# Altium PCB Sensor_Board.PcbDoc
Units mm, origin at the board's own origin, x right, y up, seen from the top; angles counter-clockwise.
Board outline 10 x 14 mm, 4 copper layers (Top Layer, Layer 1, Layer 2, Bottom Layer), stack 0.602 mm thick; 11 components, 8 nets, 50 pads, 19 vias.
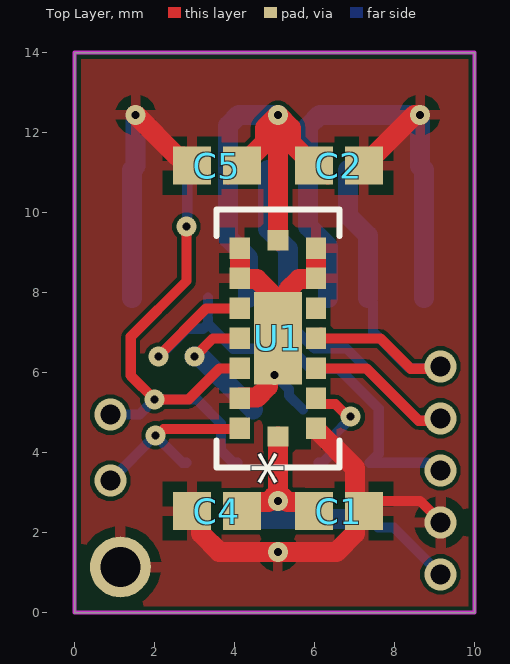
[diagram p0: Top Layer view]
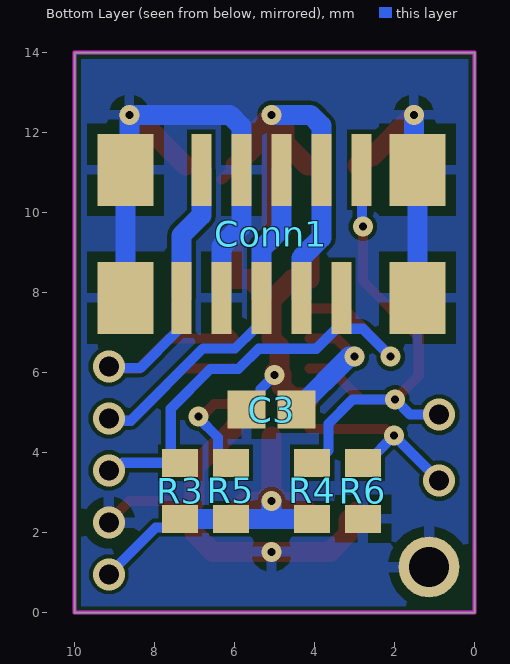
[diagram p1: Bottom Layer view, seen from below]
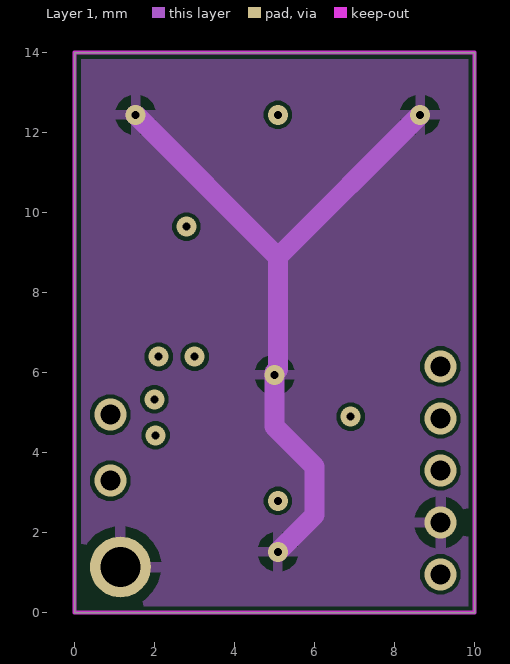
[diagram p2: Layer 1]
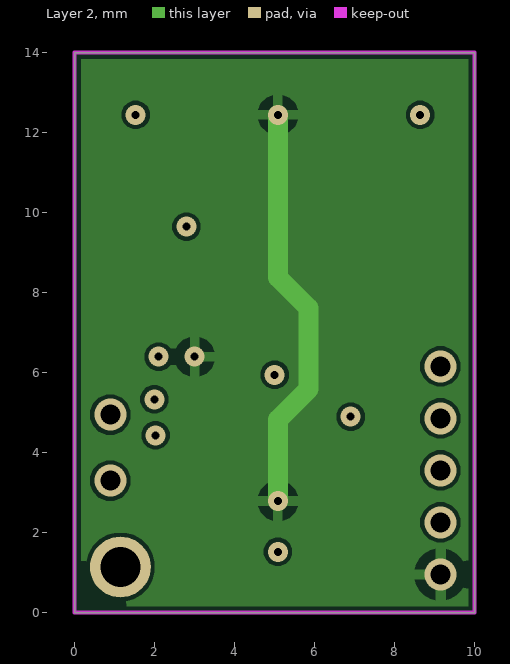
[diagram p3: Layer 2]
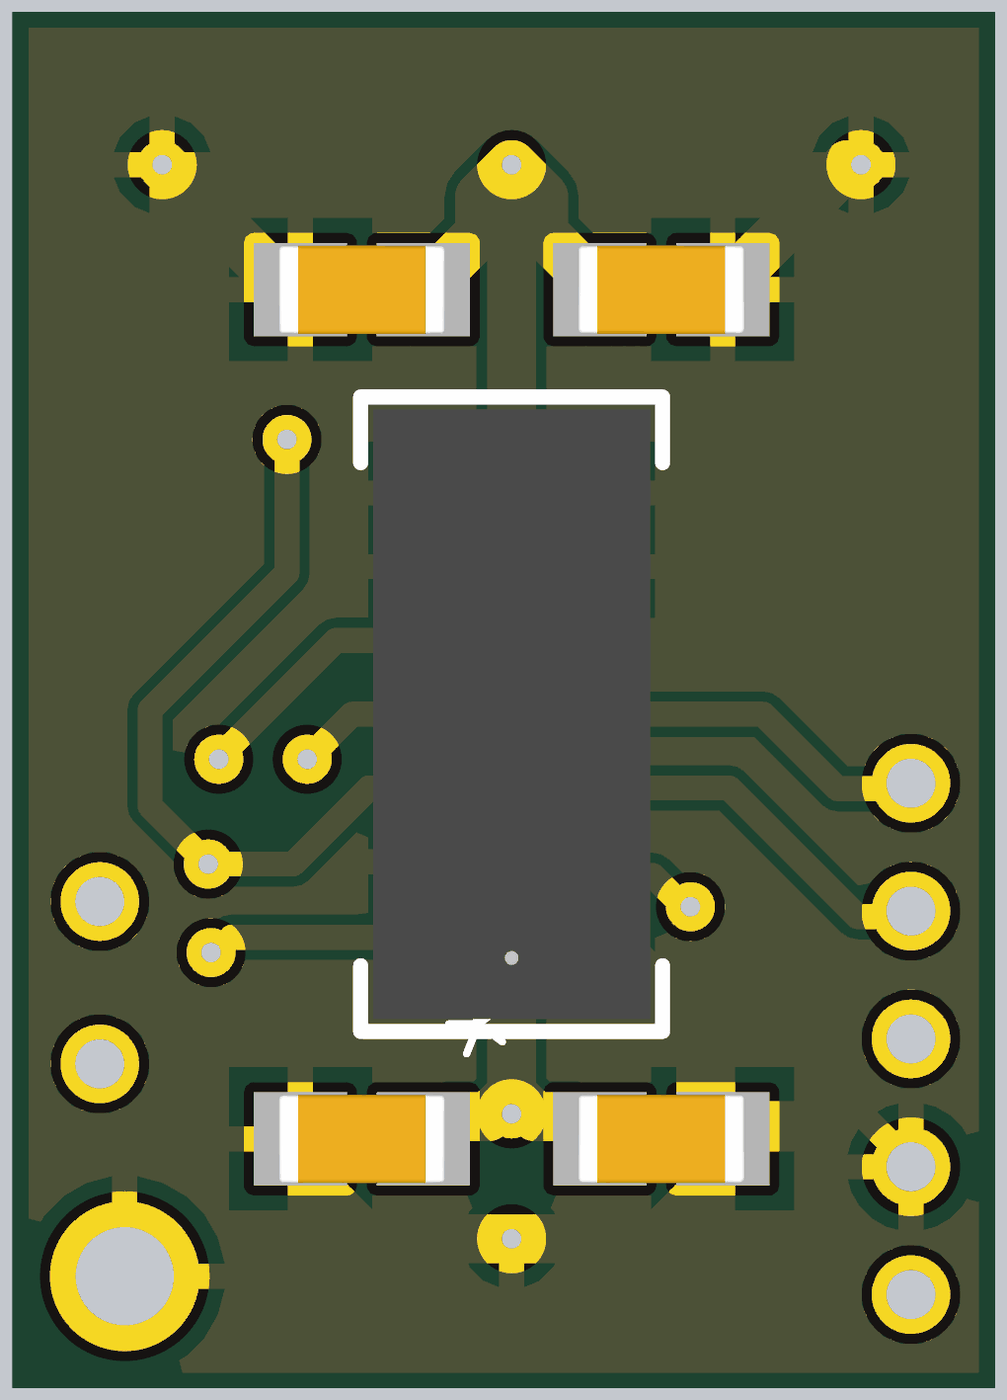
[diagram p4: 3D render of the assembled board from above, using the file's embedded part models]
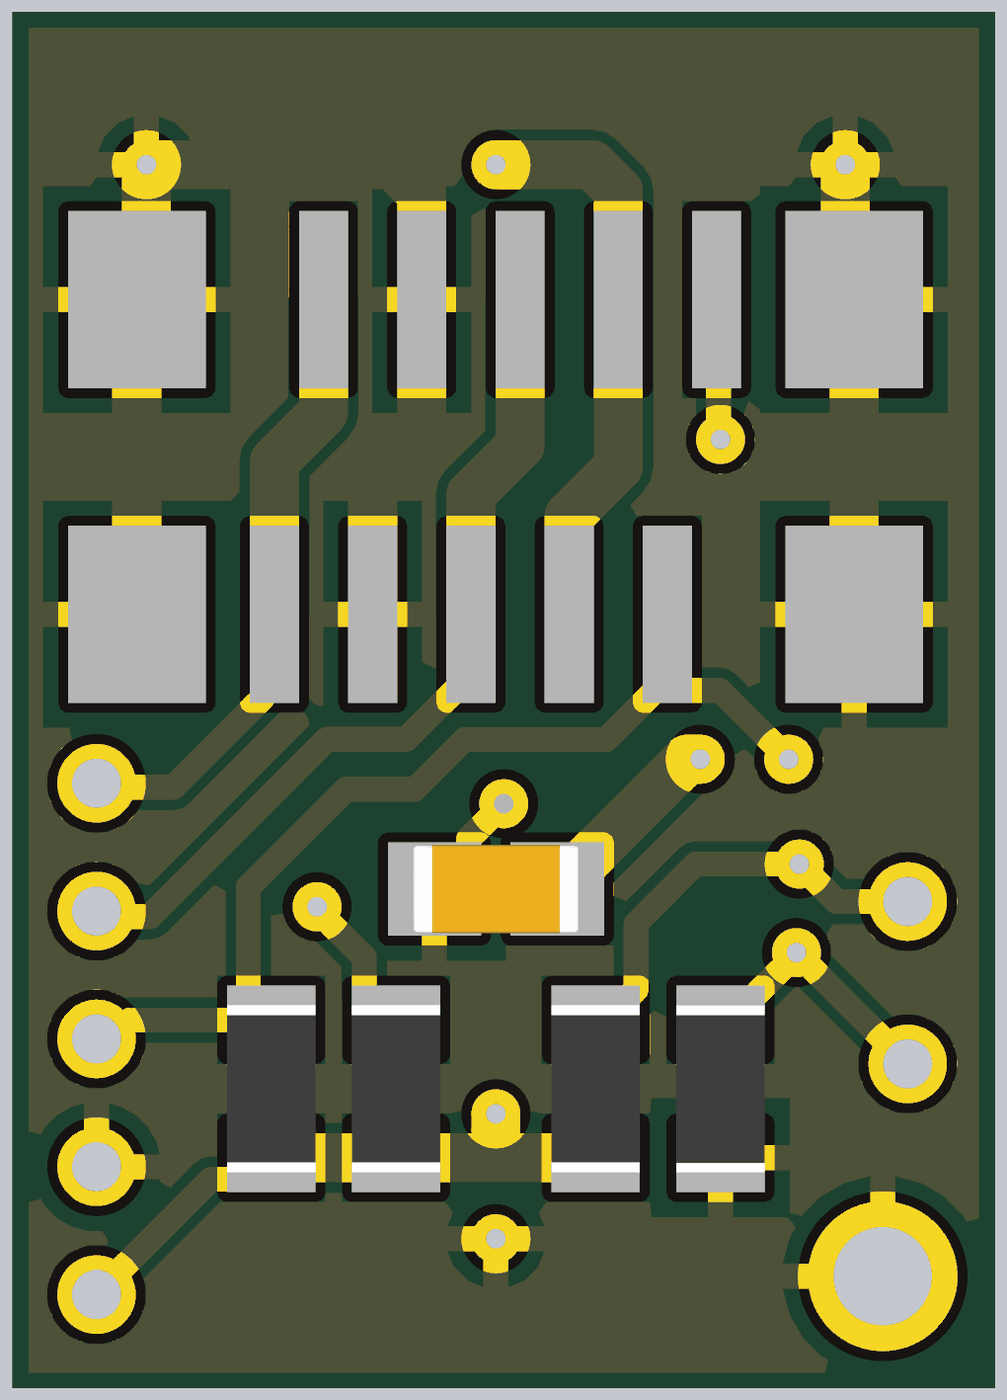
[diagram p5: 3D render of the assembled board from below, using the file's embedded part models]

## Layer stack, top to bottom
Top Solder: solder mask 0.0102, Solder Resist, Dk 3.5
Top Layer: signal copper 0.035
Dielectric 2: prepreg 0.0711, PP-006, Dk 4.1
Layer 1: signal copper 0.035
Dielectric 1: dielectric 0.32, FR-4, Dk 4.8
Layer 2: signal copper 0.035
Dielectric 3: prepreg 0.0711, PP-006, Dk 4.1
Bottom Layer: signal copper 0.035
Bottom Solder: solder mask 0.0102, Solder Resist, Dk 3.5

## Board outline
0,0 10,0 10,14 0,14

## Design rules (kind name [scope] priority, off if disabled: settings)
Clearance [All] p1: gap=0.1 ignorepadtopadclearanceinfootprint=TRUE except(0: Arc-Hole Track-Hole SMDPad-Hole THPad-Hole Via-Hole Fill-Hole Poly-Hole Region-Hole Text-Hole; 0.127: SMDPad-SMDPad SMDPad-Via SMDPad-Text THPad-Via THPad-Text Via-Text Fill-Text Poly-Text Region-Text Text-Text; 0.2: Arc-SMDPad Track-SMDPad; 0.254: Arc-THPad Arc-Via Arc-Text Track-THPad Track-Via Track-Text SMDPad-THPad THPad-THPad Via-Via)
HoleSize [All] p1: absolutevalues=TRUE maxlimit=5 minlimit=0.025 maxpercent=80.000 minpercent=20.000
PolygonConnect [All] p1: connectstyle=Relief reliefconductorwidth=0.254 reliefentries=4 polygonreliefangle="90 Angle" airgapwidth=0.254
RoutingVias [All] p1: holewidth=0.2 width=0.4 viastyle="Through Hole" minholewidth=0.2 minwidth=0.4 maxholewidth=1 maxwidth=1
SolderMaskExpansion [All] p1: expansion=0.102 istentingtop=FALSE
Width [All] p1: maxlimit=0.5 minlimit=0.127 preferedwidth=0.254
29 further rules are at their usual default settings.

## Components (designator, comment, footprint, x,y, rotation, side; value= is the part's Value field where it differs from the comment)
C1 "Capacitor 100 nF +/-10% 50 V 0603" CAPC1608X90X40NL10T20 6.604,2.54 r0 top value=100nF
C2 "Capacitor 100 nF +/-10% 50 V 0603" CAPC1608X90X40NL10T20 6.604,11.176 r0 top value=100nF
C3 "Capacitor 100 nF +/-10% 50 V 0603" CAPC1608X90X40NL10T20 5.08,5.08 r0 bottom value=100nF
C4 "Capacitor 100 nF +/-10% 50 V 0603" CAPC1608X90X40NL10T20 3.556,2.54 r180 top value=4.7uF
C5 "Capacitor 100 nF +/-10% 50 V 0603" CAPC1608X90X40NL10T20 3.556,11.176 r180 top value=4.7uF
Conn1 "ZIF_Connector_10_05mm" ZIF_CONNECTOR_10_05MM 9.534,6.874 r180 bottom
R3 "Resistor 0R +/- 5% 0603 100 mW" RESC1608X55X25NL10T15 7.366,3.048 r90 bottom value=47k
R4 "Resistor 0R +/- 5% 0603 100 mW" RESC1608X55X25NL10T15 4.064,3.048 r90 bottom value=47k
R5 "Resistor 0R +/- 5% 0603 100 mW" RESC1608X55X25NL10T15 6.096,3.048 r90 bottom value=47k
R6 "Resistor 0R +/- 5% 0603 100 mW" RESC1608X55X25NL10T15 2.794,3.048 r270 bottom value=47k
U1 "VL53L5CX" VL53L5CX 5.08,6.858 r90 top

## Footprints (in the part's own frame and the unit in brackets; to place one, negate y for a bottom-side part, rotate by r counter-clockwise, add the part's x,y. Pads: shape width x height; smd on the part's side, far side on the other; paste and mask are expansions set on the pad)
CAPC1608X90X40NL10T20 [mm] "Chip Capacitor, 2-Leads, Body 1.70x0.90mm, IPC Medium Density"
  rect 0.95x0.95 smd: 1(-0.625,0) 2(0.625,0)
  body extent -0.85,-0.45 0.85,0.45, height 0.9
RESC1608X55X25NL10T15 [mm] "Chip Resistor, 2-Leads, Body 1.70x0.90mm, IPC Medium Density"
  rect 0.7x0.9 smd: 1(-0.7,0) 2(0.7,0)
  body extent -0.85,-0.45 0.85,0.45, height 0.55
VL53L5CX [mil]
  rect 21x20 smd paste+0 mask+0: A1(-88.58,37.5) A2(-59.06,37.5) A3(-29.53,37.5) A4(0,37.5) A5(29.53,37.5) A6(59.06,37.5) A7(88.58,37.5) C1(-88.58,-37.5) C2(-59.06,-37.5) C3(-29.53,-37.5) C4(0,-37.5) C5(29.53,-37.5) C6(59.06,-37.5) C7(88.58,-37.5)
  rect 20x21 smd paste+0 mask+0: B1(-96.5,0) B7(96.5,0)
  rect 91x47 smd paste+0 mask+0: B4(0,0)
  silkscreen extent -127,-61 127,61, body extent -122,-56 122,56, height 65
ZIF_CONNECTOR_10_05MM [mm]
  rect 0.5x1.8 smd: 1(6.7,4.2) 2(6.2,1) 3(5.7,4.2) 4(5.2,1) 5(4.7,4.2) 6(4.2,1) 7(3.7,4.2) 8(3.2,1) 9(2.7,4.2) 10(2.2,1)
  rect 1.4x1.8 smd: GND(0.8,1) GND(0.8,4.2) GND(8.1,1) GND(8.1,4.2)

## Part data
C1 C2 C3 C4 C5: library part CMP-001-00017-5, "Chip Capacitor, 100 nF, +/- 10%, 50 V, 0603 (1608 Metric)", Capacitor Type=Ceramic, Case/Package=0603, Max Operating Temperature=125°C, Min Operating Temperature=-55°C, Tolerance=10%, Voltage Rating=50V, Mounting Technology=SM, Pins=2, RoHS Compliant=True
R3 R4 R5 R6: library part CMP-009-00006-4, "Chip Resistor, 0 Ohm, 0.1 W, -55 to 155 degC, 0603 (1608 Metric)", Case/Package=0603, Max Operating Temperature=155°C, Min Operating Temperature=-55°C, Power=100mW, Tolerance=5%, Voltage Rating=50V, Mounting Technology=SM, Pins=2, RoHS Compliant=True
U1: "No Description Available", Manufacturer_Part_Number=VL53L5CXV0GC/1, Mfr_Name=STMicroelectronics, Copyright="Copyright (C) 2022 Ultra Librarian. All rights reserved.", RefDes=RefDes, Type=DEV

## Free pads (board coordinates)
  round 1.524 hole 1: 5(1.143,1.143)

## Via types
v1: diameter 0.5, hole 0.2, Top Layer to Bottom Layer, 12 vias
v2: diameter 0.8, hole 0.5, Top Layer to Bottom Layer, 7 vias

## Nets (pads, with @x,y where several pads share a name; then routed paths per layer and width w, separated by ;. In a path a pad name is that pad's centre, name@x,y a point inside that pad or via, vN(x,y) a via of type N, cw(c..) or ccw(c..) an arc to the next point about the centre after c; other vN are vias at no path point)
3.3V: C1.1 C2.1 C3.1 C4.1 C5.1 Conn1.3 Conn1.4 R3.1 R4.1 R5.1 U1.A4 U1.B1 U1.B7 | length 36.8
  Top Layer w0.254: v1(3,6.4) 3.458,6.858 U1.A4 ; C5.1@3.833,10.828 C5.1 ; C2.1 C2.1@6.327,10.828
  Top Layer w0.5: C4.1 4.406,2.765 4.838,2.765 4.974,2.9 v1(5.08,2.794) ; C5.1 4.754,11.749 4.754,12.12 v1(5.08,12.446) ; U1.B1 v1(5.08,2.794) ; U1.B7 v1(5.08,12.446) ; C1.1 5.754,2.765 5.322,2.765 5.186,2.9 v1(5.08,2.794) ; C2.1 5.406,11.749 5.406,12.12 v1(5.08,12.446)
  Layer 2 w0.5: v1(5.08,2.794) 5.08,4.826 5.842,5.588 5.842,7.62 5.08,8.382 v1(5.08,12.446)
  Bottom Layer w0.254: R3.1 7.585,2.129 7.978,2.129 9.144,0.963 v2(9.144,0.956)
  Bottom Layer w0.5: v1(3,6.4) 3.135,6.4 C3.1 ; R4.1 5.08,2.348 ; Conn1.4 4.334,8.874 3.834,9.374 Conn1.3 3.834,12.177 4.103,12.446 v1(5.08,12.446) ; v1(5.08,2.794) 5.08,2.348 ; R3.1 R5.1 5.08,2.348
GND: C1.2 C2.2 C3.2 C4.2 C5.2 Conn1.7 Conn1.8 Conn1.GND pad.5 R6.2 U1.A2 U1.A6 U1.A7 U1.B4 U1.C1 U1.C6 U1.C7 | length 57.7
  Top Layer w0.254: C1.2 7.483,2.794 8.636,2.794 9.144,2.286 v2(9.144,2.256)
  Top Layer w0.5: v1(1.524,12.446) 2.569,11.401 2.706,11.401 C5.2 ; C4.2 3.156,2.315 3.156,1.979 3.611,1.524 v1(5.08,1.524) 6.549,1.524 7.004,1.979 7.004,2.315 C1.2 7.004,2.765 7.004,3.624 6.032,4.595 U1.C1 ; U1.A2 4.127,5.371 4.132,5.375 4.551,5.375 4.831,5.655 4.831,5.953 4.879,6 4.879,6.657 U1.B4 U1.B4@5.08,7.765 ; U1.A7 4.127,8.345 4.132,8.341 4.551,8.341 5.08,7.813 U1.B4@5.08,7.765 ; U1.B4@4.879,6.297 4.879,6.121 U1.B4@5,6 ; U1.C7 U1.C6 6.032,8.345 6.028,8.341 5.609,8.341 5.329,8.061 5.329,8.014 U1.B4@5.08,7.765 ; C2.2 8.499,12.446 v1(8.636,12.446)
  Layer 1 w0.5: v1(1.524,12.446) 5.081,8.889 ; v1(5.08,1.524) 6,2.444 6,3.652 5,4.652 5,6 5.081,6.081 5.081,8.891 v1(8.636,12.446)
  Bottom Layer w0.254: v1@5,6 v1(5,5.947) 5.357,5.59 5.357,5.428 C3.2
  Bottom Layer w0.5: Conn1.GND@1.434,7.874 1.434,11.074 1.524,11.164 v1(1.524,12.446) ; Conn1.8 6.334,9.16 5.834,9.66 5.834,12.153 6.127,12.446 v1(8.636,12.446) 8.636,11.172 8.734,11.074 Conn1.GND@8.734,7.874
I2C_RST: R6.1 U1.A1 | length 4.8
  Top Layer w0.254: v1(2.021,4.434) 2.072,4.434 2.228,4.59 4.11,4.59 U1.A1
  Bottom Layer w0.254: v2(0.889,3.302) v1(2.021,4.434) 2.021,4.421 2.694,3.748 R6.1
INT: Conn1.1 R4.2 U1.A3 | length 13.4
  Top Layer w0.254: v1(2.794,9.652) 2.794,8.294 1.4,6.9 1.4,5.926 v1(1.992,5.334) 2.854,5.334 3.628,6.108 U1.A3
  Bottom Layer w0.254: v2(0.889,4.953) 1.611,4.953 v1(1.992,5.334) 3.048,5.334 3.653,4.729 3.653,4.059 3.964,3.748 R4.2 ; v1(2.794,9.652) 2.814,9.672 2.814,11.054 Conn1.1
LPn: Conn1.2 R3.2 U1.A5 | length 13.1
  Top Layer w0.254: v1(2.1,6.4) 2.1,6.418 3.29,7.608 U1.A5
  Bottom Layer w0.254: v1(2.1,6.4) 2.801,7.101 3.211,7.101 Conn1.2@3.334,7.224 ; Conn1.2@3.334,7.366 Conn1.2@3.334,7.224 ; Conn1.2@3.334,7.489 Conn1.2 ; v2(9.144,3.556) 8.996,3.556 8.804,3.748 R3.2 7.377,3.748 7.6,3.971 7.6,5.1 6.604,6.096 5.904,6.096 5.4,6.6 3.958,6.6 Conn1.2@3.334,7.224
RSVD6: R5.2 U1.C2 | length 2.6
  Top Layer w0.254: U1.C2 6.032,5.345 6.159,5.218 6.515,5.218 6.833,4.9 v1(6.9,4.9)
  Bottom Layer w0.254: R5.2 6.196,3.748 6.419,3.971 6.419,4.382 6.9,4.863 v1(6.9,4.9)
SCL: Conn1.9 Conn1.10 U1.C4 | length 10.2
  Top Layer w0.254: U1.C4@6.159,6.998 6.032,6.871 U1.C4 7.642,6.858 8.4,6.1 9.088,6.1 v2(9.144,6.156) v2@9.144,6.304
  Bottom Layer w0.254: Conn1.10 7.457,7.751 7.457,7.021 8.363,6.115 9.103,6.115 v2(9.144,6.156)
  Bottom Layer w0.5: Conn1.9 6.834,9.93 7.334,9.43 Conn1.10
SDA: Conn1.5 Conn1.6 U1.C3 | length 12.6
  Top Layer w0.254: U1.C3@6.041,6.117 U1.C3 7.292,6.108 8.6,4.8 9.088,4.8 v2(9.144,4.856)
  Bottom Layer w0.254: Conn1.6 5.334,7.224 5.457,7.101 5.495,7.101 5.992,6.604 6.796,6.604 8.6,4.8 9.088,4.8 v2(9.144,4.856)
  Bottom Layer w0.5: Conn1.5@4.834,11.066 4.834,9.594 5.334,9.094 Conn1.6
pads on no net: U1.C5

## Polygon pours and split planes (outlines as drawn)
GND on Layer 1 "NONET_L-01_P-001" (solid, pour order 4): 0,0 10,0 10,14 0,14
3.3V on Layer 2 "NONET_L-01_P-001" (solid, pour order 5): 0,14 0,0 10,0 10,14
GND on Bottom Layer "NONET_L-01_P-001" (solid, pour order 6): 0,0 10,0 10,14 0,14
GND on Top Layer "NONET_L-01_P-001" (solid, pour order 0): 0,14 0,0 10,0 10,14

## Keep-outs
Keep-Out Layer:
  the board outline again, w0.1

## Text inside footprints (layer, text, board x,y; h text height)
U1: Top Overlay "*" at 5.715,3.175 h1.27 r90